# Altium PCB Keyboard.PcbDoc
Units mil, origin at the board's own origin, x right, y up, seen from the top; angles counter-clockwise.
Board outline 3000 x 3930 mil, 2 copper layers (Top Layer, Bottom Layer), stack 65.792 mil thick; 78 components, 48 nets, 290 pads, 195 vias.
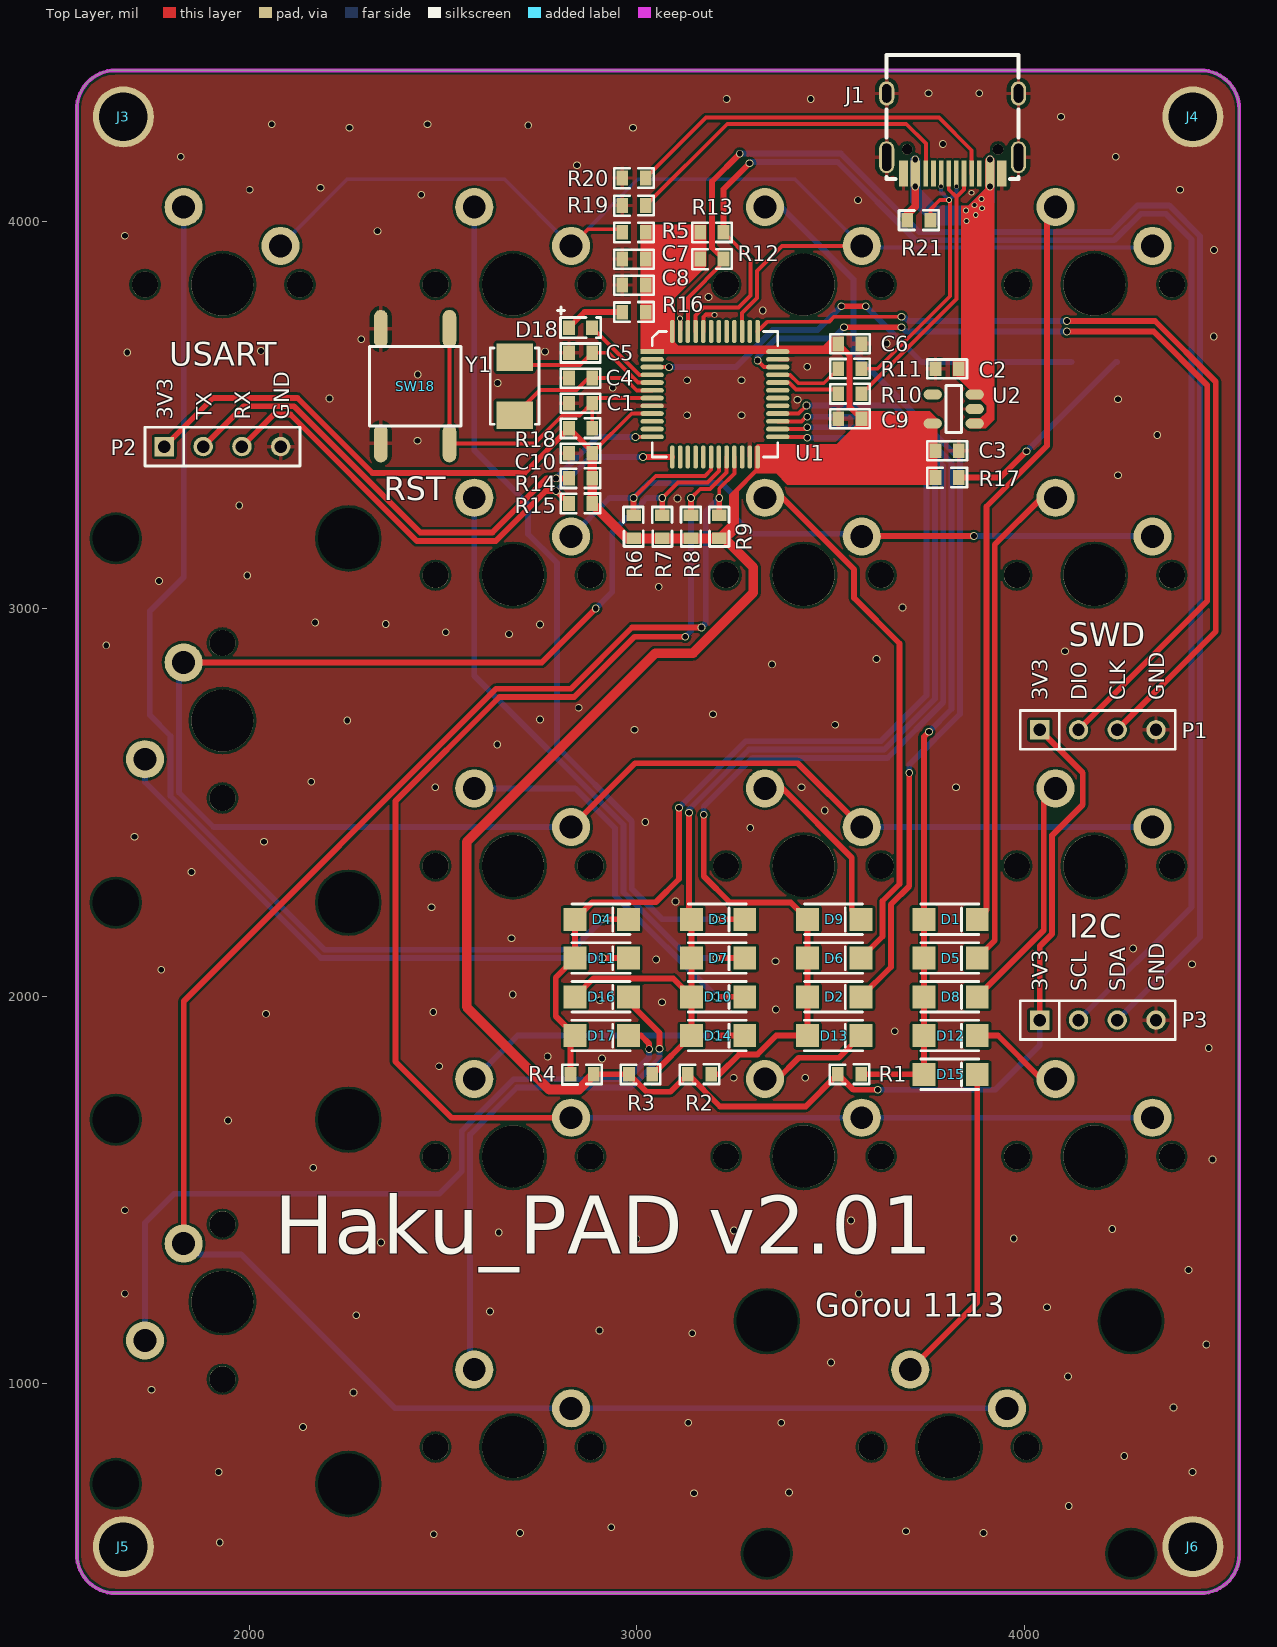
[diagram p0: Top Layer view]
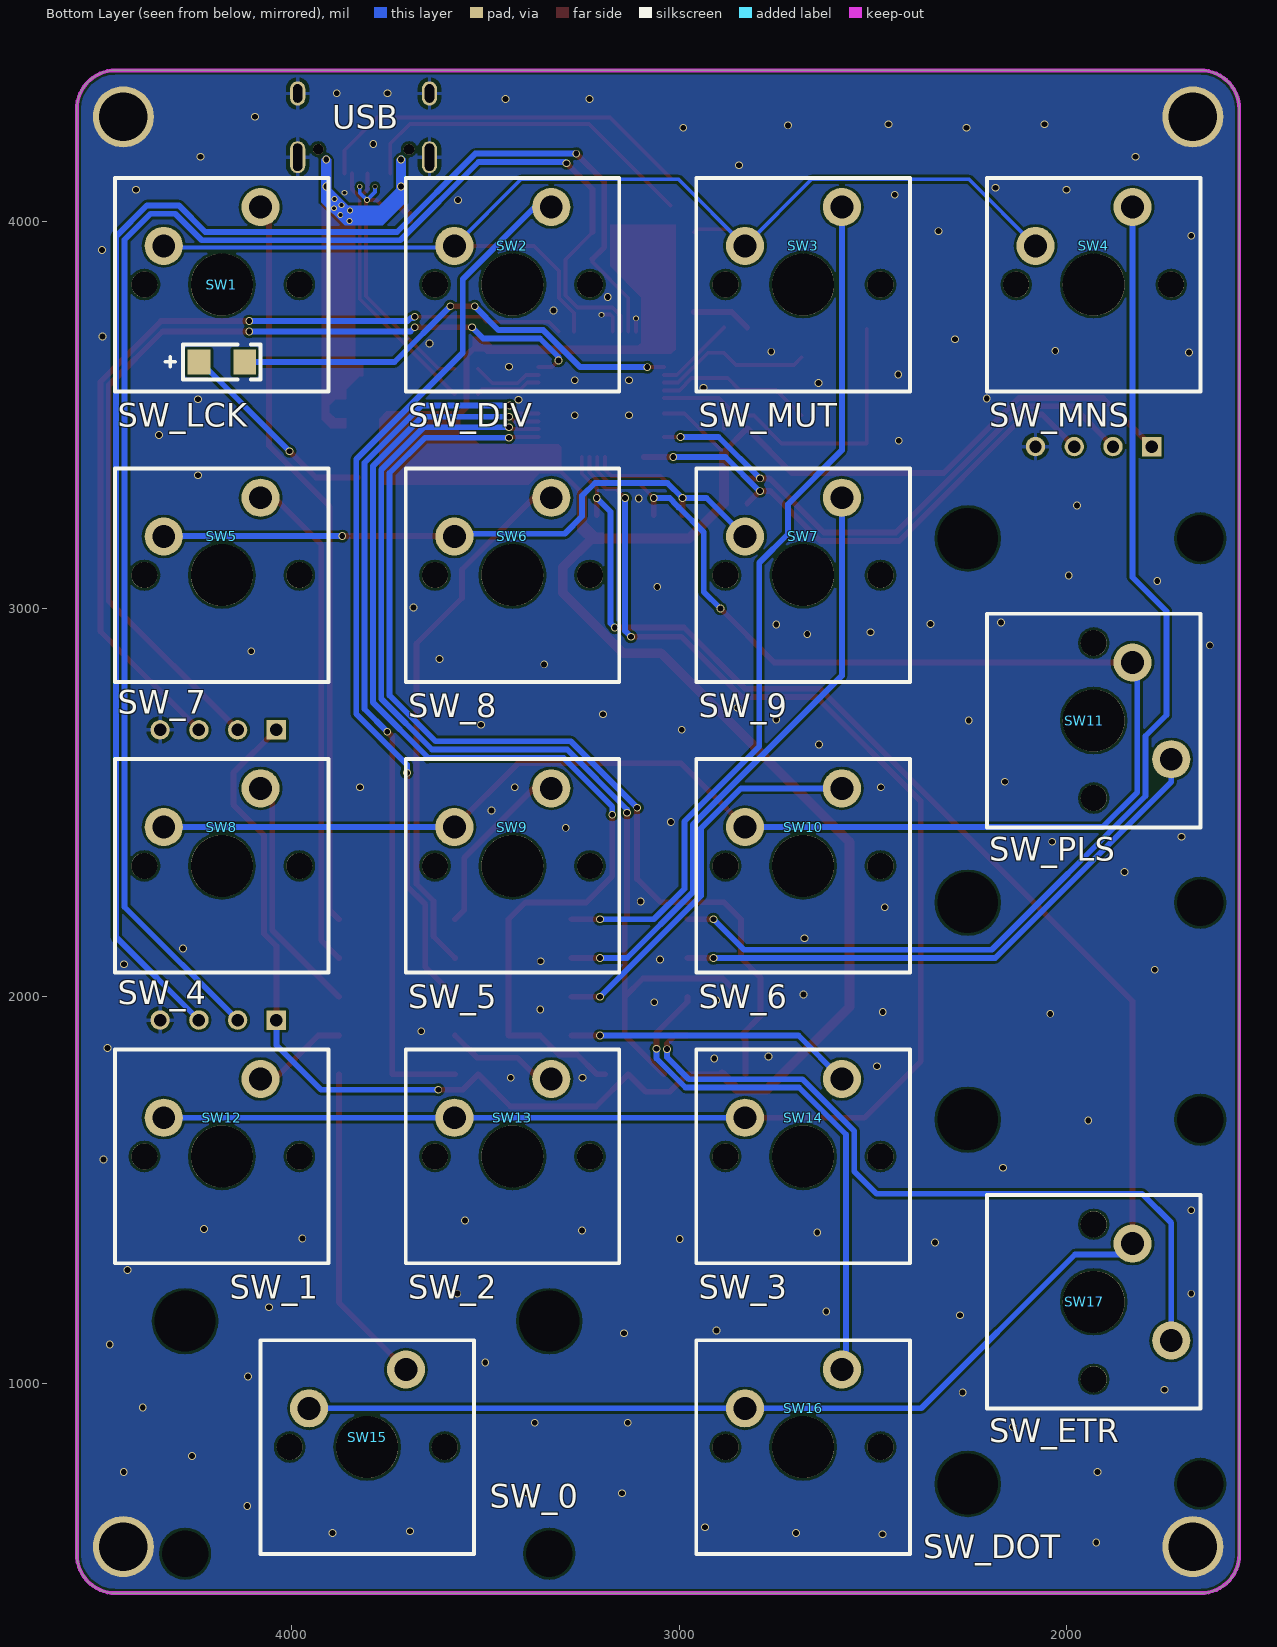
[diagram p1: Bottom Layer view, seen from below]
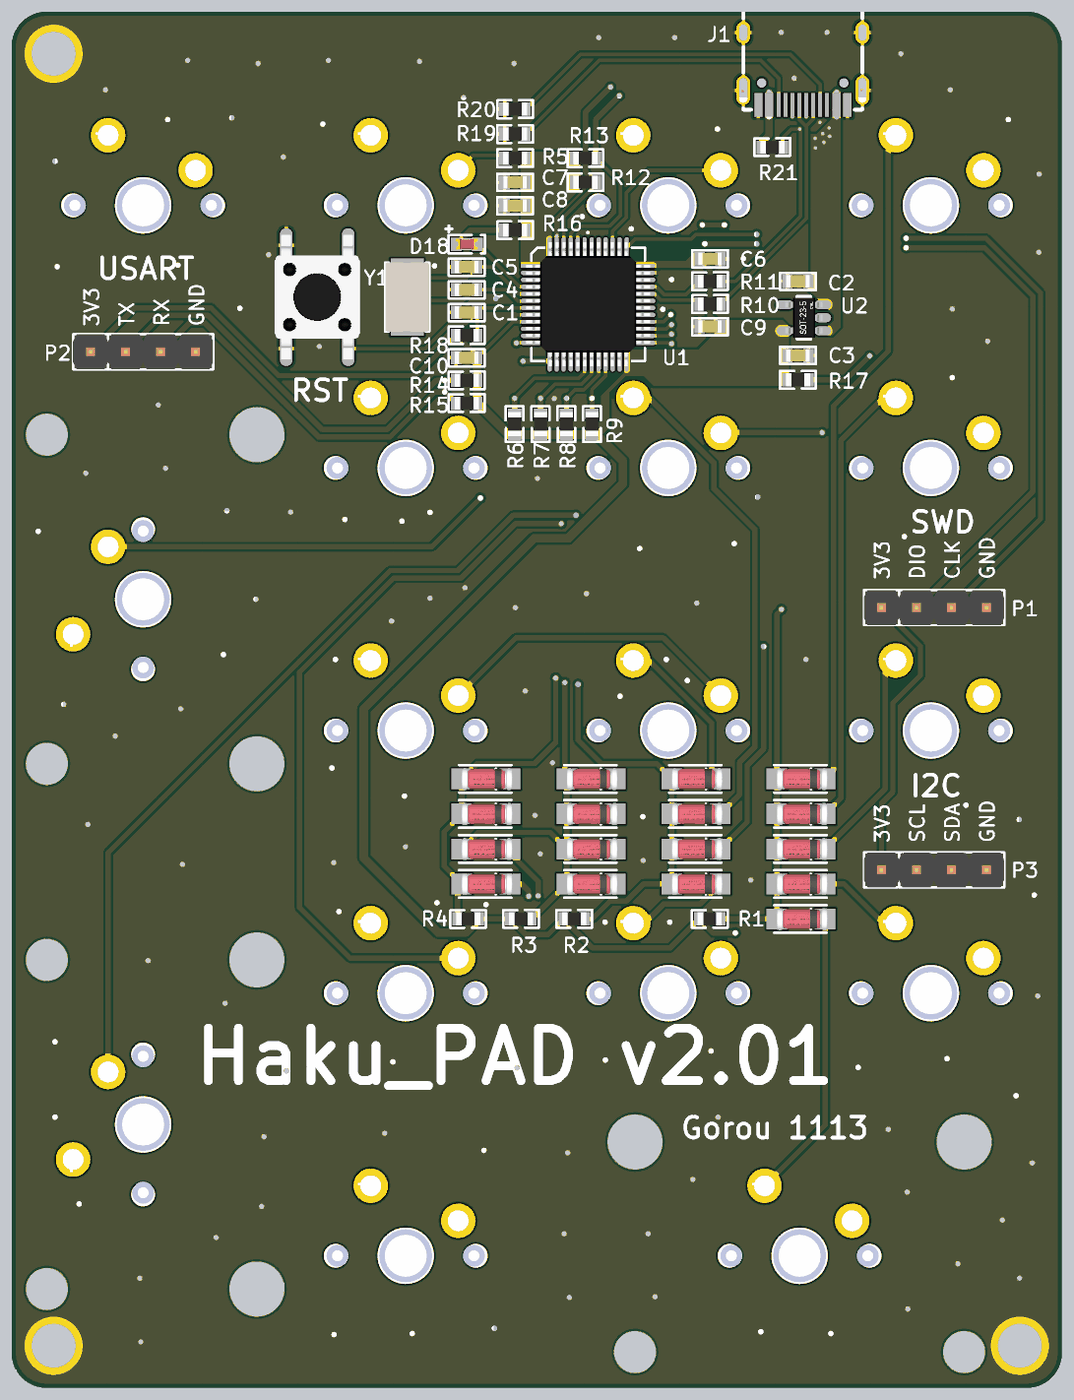
[diagram p2: 3D render of the assembled board from above, using the file's embedded part models]
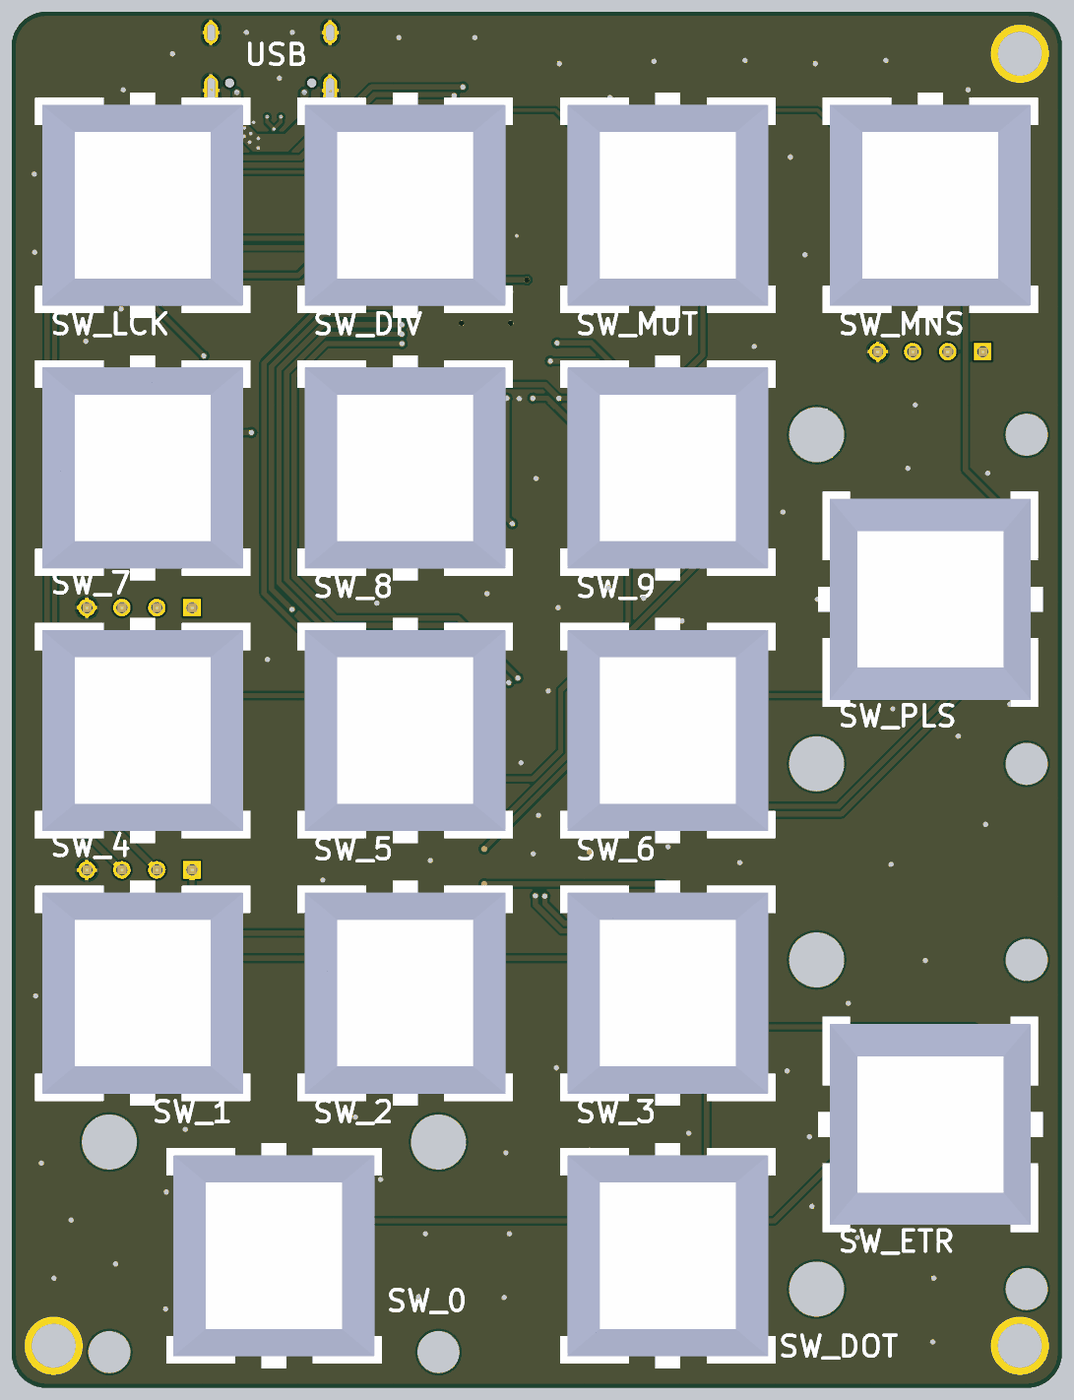
[diagram p3: 3D render of the assembled board from below, using the file's embedded part models]

## Layer stack, top to bottom
Top Solder: solder mask 0.4, Solder Resist, Dk 3.5
Top Layer: signal copper 1.4
Dielectric 1: dielectric 62.9921, FR-4, Dk 4.8
Bottom Layer: signal copper 1.4
Bottom Solder: solder mask 0.4, Solder Resist, Dk 3.5

## Board outline
1555,560 ccw(c1655,560) 1655,460 4455,460 ccw(c4455,560) 4555,560 4555,4290 ccw(c4455,4290) 4455,4390 1655,4390 ccw(c1655,4290) 1555,4290

## Design rules (kind name [scope] priority, off if disabled: settings)
Clearance [All] p1: gap=6.5 ignorepadtopadclearanceinfootprint=FALSE
DiffPairsRouting [All] p1: maxlimit=39370.08 minlimit=6.5 mostfreqgap=7.01 toplayer_minwidth=7 toplayer_maxwidth=39370.08 toplayer_prefwidth=7.01 bottomlayer_minwidth=7 bottomlayer_maxwidth=39370.08 bottomlayer_prefwidth=7.01 maxuncoupledlength=500
HoleSize [All] p1: absolutevalues=TRUE maxlimit=236.22 minlimit=0.98 maxpercent=80.000 minpercent=20.000
MinimumSolderMaskSliver [All] p1 off: minsoldermaskwidth=10
PolygonConnect PolygonConnect_isPad [(InPadClass('All Pads') AND ( Not HasFootprint('PADR3/4')))] p1: connectstyle=Relief reliefconductorwidth=10 reliefentries=4 polygonreliefangle="90 Angle" airgapwidth=10
PolygonConnect PolygonConnect_isHole [HasFootprint('PADR3/4') vs InNet('GND')] p2: connectstyle=Direct reliefconductorwidth=10 reliefentries=4 polygonreliefangle="90 Angle" airgapwidth=10
PolygonConnect [All] p3: connectstyle=Direct reliefconductorwidth=10 reliefentries=4 polygonreliefangle="90 Angle" airgapwidth=10
RoutingVias [All] p1: holewidth=28 width=50 viastyle="Through Hole" minholewidth=19.68 minwidth=27.56 maxholewidth=236.22 maxwidth=3937.01
SilkToSilkClearance [All] p1 off: silktosilkclearance=10
SilkToSolderMaskClearance [IsPad] p1 off: minsilkscreentomaskgap=10 clearancetoexposedcopper=TRUE
SolderMaskExpansion [All] p1: expansion=4
Width [All] p1: maxlimit=39370.08 minlimit=7 preferedwidth=7.01
25 further rules are at their usual default settings.

## Classes and differential pairs
component class Keyboard_KEYS: D1 D2 D3 D4 D5 D6 D7 D8 D9 D10 D11 D12 D13 D14 D15 D16 D17 J3 J4 J5 J6 R1 R2 R3 R4 R5 R6 R7 R8 R9 SW1 SW2 SW3 SW4 SW5 SW6 SW7 SW8 SW9 SW10 SW11 SW12 SW13 SW14 SW15 SW16 SW17
component class Keyboard_SYS: C1 C2 C3 C4 C5 C6 C7 C8 C9 C10 D18 J1 P1 P2 P3 R10 R11 R12 R13 R14 R15 R16 R17 R18 R19 R20 R21 SW18 U1 U2 Y1

## Components (designator, comment, footprint, x,y, rotation, side; value= is the part's Value field where it differs from the comment)
C1 "104" C0603 2825,3531 r0 top
C2 "105" C0603 3771,3620 r0 top value=104
C3 "105" C0603 3831,3408 r180 top value=104
C4 "15P" C0603 2825,3596 r0 top value=104
C5 "15P" C0603 2825,3661 r0 top value=104
C6 "105" C0603 3580,3684 r180 top value=104
C7 "105" C0603 2963,3903 r0 top value=104
C8 "105" C0603 2963,3836 r0 top value=104
C9 "105" C0603 3520,3491 r0 top value=104
C10 "105" C0603 2825,3402 r0 top value=104
D1 "1N4148" SOD80 3741,2199 r0 top locked
D2 "1N4148" SOD80 3441,1999 r0 top locked
D3 "1N4148" SOD80 3141,2199 r0 top locked
D4 "1N4148" SOD80 2841,2199 r0 top locked
D5 "1N4148" SOD80 3741,2099 r0 top locked
D6 "1N4148" SOD80 3441,2099 r0 top locked
D7 "1N4148" SOD80 3141,2099 r0 top locked
D8 "1N4148" SOD80 3741,1999 r0 top locked
D9 "1N4148" SOD80 3441,2199 r0 top locked
D10 "1N4148" SOD80 3141,1999 r0 top locked
D11 "1N4148" SOD80 2841,2099 r0 top locked
D12 "1N4148" SOD80 3741,1899 r0 top locked
D13 "1N4148" SOD80 3441,1899 r0 top locked
D14 "1N4148" SOD80 3141,1899 r0 top locked
D15 "1N4148" SOD80 3741,1799 r0 top locked
D16 "1N4148" SOD80 2841,1999 r0 top locked
D17 "1N4148" SOD80 2841,1899 r0 top locked
D18 "RED LED" LED0603-RED 2825,3726 r0 top
J1 "TYPEC-304S-ACP16" USB-C-SMD_TYPEC-304-BCP16 3815,4230 r180 top
J3 "Hole" PADR3/4#1 1645,4415 r0 top
J4 "Hole" PADR3/4#2 3704,4663 r0 top
J5 "Hole" PADR3/4#3 1640,525 r0 top
J6 "Hole" PADR3/4#4 4480,520 r0 top
P1 "SWD" SIP4 4040,2688 r0 top
P2 "USART" SIP4 1781,3419 r0 top
P3 "I2C" SIP4 4040,1939 r0 top
R1 "10K" R0603 3519,1799 r0 top locked value=1K
R2 "10K" R0603 3132,1799 r0 top locked value=1K
R3 "10K" R0603 2980,1799 r0 top locked value=1K
R4 "10K" R0603 2889,1799 r180 top locked value=1K
R5 "10K" R0603 3023,3972 r180 top value=1K
R6 "10K" R0603 2992,3182 r90 top value=1K
R7 "10K" R0603 3066,3182 r90 top value=1K
R8 "10K" R0603 3140,3182 r90 top value=1K
R9 "10K" R0603 3213,3182 r90 top value=1K
R10 "33" R0603 3520,3555 r0 top value=1K
R11 "33" R0603 3520,3620 r0 top value=1K
R12 "10K" R0603 3224,3903 r180 top value=1K
R13 "10K" R0603 3224,3972 r180 top value=1K
R14 "10K" R0603 2825,3337 r0 top value=1K
R15 "10K" R0603 2825,3272 r0 top value=1K
R16 "1K" R0603 2963,3766 r0 top
R17 "1K" R0603 3831,3339 r180 top
R18 "10K" R0603 2825,3466 r0 top value=1K
R19 "5K1" R0603 3023,4041 r180 top value=1K
R20 "5K1" R0603 3023,4112 r180 top value=1K
R21 "1K5" R0603 3698,4003 r0 top value=1K
SW1 "SW_LCK" MX_SW-4-1206LED 4180.71,3837.01 r0 bottom locked
SW2 "SW_DIV" MX_SW-4 3430.71,3837.01 r0 bottom locked
SW3 "SW_MUT" MX_SW-4 2680.71,3837.01 r0 bottom locked
SW4 "SW_MNS" MX_SW-4 1930.71,3837.01 r0 bottom locked
SW5 "SW_7" MX_SW-4 4180.71,3087.01 r0 bottom locked
SW6 "SW_8" MX_SW-4 3430.71,3087.01 r0 bottom locked
SW7 "SW_9" MX_SW-4 2680.71,3087.01 r0 bottom locked
SW8 "SW_4" MX_SW-4 4180.71,2337.01 r0 bottom locked
SW9 "SW_5" MX_SW-4 3430.71,2337.01 r0 bottom locked
SW10 "SW_6" MX_SW-4 2680.71,2337.01 r0 bottom locked
SW11 "SW_PLS" MX_SW-4_1x2_r 1930.71,2712.01 r90 bottom locked
SW12 "SW_1" MX_SW-4 4180.71,1587.01 r0 bottom locked
SW13 "SW_2" MX_SW-4 3430.71,1587.01 r0 bottom locked
SW14 "SW_3" MX_SW-4 2680.71,1587.01 r0 bottom locked
SW15 "SW_0" MX_SW-4_1x2 3805.71,837.01 r0 bottom locked
SW16 "SW_DOT" MX_SW-4 2680.71,837.01 r0 bottom locked
SW17 "SW_ETR" MX_SW-4_1x2_r 1930.71,1212.01 r90 bottom locked
SW18 "RST" "Push Buttom SMD" 2428,3575 r270 top
U1 "CH32V103C8T6" PQFP48 3040,3664 r0 top
U2 "RT9013-33" SOT-23-5 3818,3516 r180 top
Y1 "8MHz" CY5032 2685,3500 r90 top

## Footprints (in the part's own frame and the unit in brackets; to place one, negate y for a bottom-side part, rotate by r counter-clockwise, add the part's x,y. Pads: shape width x height; smd on the part's side, far side on the other; paste and mask are expansions set on the pad)
C0603 [mil]
  rect 30x38 smd: 1(0,0) 2(60,0)
  silkscreen extent -21,-25 81,24, body extent -3,-18 63,18, height 35
CY5032 [mm]
  rect 1.8x2.4 smd: 1(0,0) 2(3.8,0)
  silkscreen extent -0.6,-1.6 4.4,1.6, body extent -0.59,-1.6 4.41,1.6, height 1.23
LED0603-RED [mil]
  rect 31x38 smd: 1(0,0) 2(60,0)
  silkscreen extent -22,-26 82,26, body extent -1,-16 62,16, height 24
MX_SW-4 [mil] "with Fixation pins  1-Pole"
  round 98.43 hole 59.06: 1(150,-100) 2(-100,-200)
  round 67 hole 67: ""(-200,0) ""(200,0)
  round 160 hole 160: ""(0,0)
  silkscreen extent -276,-276 276,276, body extent -308,-321 308,321, height 586
MX_SW-4-1206LED [mm] "with Fixation pins  1-Pole"
  round 2.5 hole 1.5: 1(3.81,-2.54) 2(-2.54,-5.08)
  rect 1.49x1.62 smd: 3(1.492,5.08) 4(-1.492,5.08)
  round 1.702 hole 1.702: ""(-5.08,0) ""(5.08,0)
  round 4.064 hole 4.064: ""(0,0)
  silkscreen extent -7,-7 7,7, body extent -7.82,-8.17 7.82,8.17, height 14.89
MX_SW-4_1x2 [mil] "with Fixation pins  1-Pole"
  round 98.43 hole 59.06: 1(150,-100) 2(-100,-200)
  round 0 hole 120: 5(-470,275) 7(470,275)
  round 0 hole 157: 6(-470,-325) 8(470,-325)
  round 67 hole 67: ""(-200,0) ""(200,0)
  round 160 hole 160: ""(0,0)
  silkscreen extent -276,-276 276,276, body extent -308,-321 308,321, height 586
MX_SW-4_1x2_r [mil] "with Fixation pins  1-Pole"
  round 98.43 hole 59.06: 1(150,-100) 2(-100,-200)
  round 0 hole 120: 3(-470,-275) 6(470,-275)
  round 0 hole 157: 4(-470,325) 5(470,325)
  round 67 hole 67: ""(-200,0) ""(200,0)
  round 160 hole 160: ""(0,0)
  silkscreen extent -276,-276 276,276, body extent -308,-321 308,321, height 586
PADR3/4#1 [mm]
  round 4 hole 3.2: 1(0.762,-3.683)
PADR3/4#2 [mm]
  round 4 hole 3.2: 1(18.567,-9.982)
PADR3/4#3 [mm]
  round 4 hole 3.2: 1(0.889,1.397)
PADR3/4#4 [mm]
  round 4 hole 3.2: 1(-1.143,1.524)
PQFP48 [mil]
  rect 60x12 smd: 1(-0.17,0.2)
  oval 60x12 smd: 2(-0.17,-19.8) 3(-0.17,-39.8) 4(-0.17,-59.8) 5(-0.17,-79.8) 6(-0.17,-99.8) 7(-0.17,-119.8) 8(-0.17,-139.8) 9(-0.17,-159.8) 10(-0.17,-179.8) 11(-0.17,-199.8) 12(-0.17,-219.8) 25(323.83,-219.8) 26(323.83,-199.8) 27(323.83,-179.8) 28(323.83,-159.8) 29(323.83,-139.8) 30(323.83,-119.8) 31(323.83,-99.8) 32(323.83,-79.8) 33(323.83,-59.8) 34(323.83,-39.8) 35(323.83,-19.8) 36(323.83,0.2)
  oval 12x60 smd: 13(51.83,-271.8) 14(71.83,-271.8) 15(91.83,-271.8) 16(111.83,-271.8) 17(131.83,-271.8) 18(151.83,-271.8) 19(171.83,-271.8) 20(191.83,-271.8) 21(211.83,-271.8) 22(231.83,-271.8) 23(251.83,-271.8) 24(271.83,-271.8) 37(271.83,52.2) 38(251.83,52.2) 39(231.83,52.2) 40(211.83,52.2) 41(191.83,52.2) 42(171.83,52.2) 43(151.83,52.2) 44(131.83,52.2) 45(111.83,52.2) 46(91.83,52.2) 47(71.83,52.2) 48(51.83,52.2)
  silkscreen extent 0,-272 324,52, body extent -15,-286 339,68, height 57
"Push Buttom SMD" [mm]
  oval 2.5x0.9 smd: 1(-3.75,2.25) 2(3.75,2.25) 3(-3.75,-2.25) 4(3.75,-2.25)
  silkscreen extent -2.6,-3 2.6,3, body extent -4.5,-3 4.5,3, height 5
R0603 [mil]
  rect 30x38 smd: 1(0,0) 2(60,0)
  silkscreen extent -21,-25 81,26, body extent -4,-19 64,19, height 22
SIP4 [mil]
  rect 50x50 hole 32: 1(0,0)
  round 50 hole 32: 2(100,0) 3(200,0) 4(300,0)
  silkscreen extent -50,-50 350,50, body extent -50,-50 350,50, height 337
SOD80 [mm]
  rect 1.5x1.5 smd: 1(0,0) 2(3.5,0)
  silkscreen extent -0.2,-1 3.6,1, body extent -0.02,-0.81 3.68,0.79, height 1.6
SOT-23-5 [mm] "SOT23, 5-Leads, Body 2.90x2.79mm, Pitch 0.95mm, IPC Medium Density"
  oval 1.2x0.65 smd: 1(-1.375,0.95) 2(-1.375,0) 3(-1.375,-0.95) 4(1.375,-0.95) 5(1.375,0.95)
  silkscreen extent -0.5,-1.55 0.5,1.55, body extent -1.35,-1.45 1.35,1.45, height 1.09
USB-C-SMD_TYPEC-304-BCP16 [mm]
  oval 1x2.1 hole 0.6 slot 1.8 at 90 deg: 13(-4.32,1.633) 14(4.32,1.633)
  oval 1x1.6 hole 0.6 slot 1.2 at 90 deg: 15(-4.32,-2.547) 16(4.32,-2.547)
  rect 0.6x1.7 smd: A1B12(-3.225,2.7) A4B9(-2.45,2.7) B1A12(3.22,2.7) B4A9(2.45,2.7)
  rect 0.3x1.7 smd: A5(-1.25,2.7) A6(-0.25,2.7) A7(0.25,2.7) A8(1.25,2.7) B5(1.75,2.7) B6(0.75,2.7) B7(-0.75,2.7) B8(-1.75,2.7)
  round 0.7 hole 0.7 unplated: ""(-2.98,1.102) ""(2.98,1.102)
  silkscreen extent -4.32,-5.08 4.32,3.05

## Part data
C1 C2 C3 C4 C5 C6 C7 C8 C9 C10: library part "Cap Semi", "Capacitor (Semiconductor SIM Model)", LatestRevisionDate=29-May-2009, LatestRevisionNote="IPC-7351 Footprint Added.", PackageDescription="Chip Capacitor", PackageReference=C1206, Published=8-Jun-2000, Publisher="Altium Limited"
D1 D2 D3 D4 D5 D6 D7 D8 D9 D10 D11 D12 D13 D14 D15 D16 D17: library part Diode, "Default Diode"
D18: library part LED2, "Typical RED, GREEN, YELLOW, AMBER GaAs LED", LatestRevisionDate=17-Jul-2002, LatestRevisionNote="Re-released for DXP Platform.", PackageDescription="SM LED; 2 Flat Leads", PackageReference=3.2X1.6X1.1, PackageVersion=Feb-2002, Published=8-Jun-2000, Publisher="Altium Limited"
P1 P2 P3: library part "Header 4", "Header, 4-Pin", LatestRevisionDate=17-Jul-2002, LatestRevisionNote="Re-released for DXP Platform.", Publisher="Altium Limited"
R1 R2 R3 R4 R5 R6 R7 R8 R9 R10 R11 R12 R13 R14 R15 R16 R17 R18 R19 R20 R21: library part Res2, "Resistor", LatestRevisionDate=17-Jul-2002, LatestRevisionNote="Re-released for DXP Platform.", PackageDescription="Axial Device, Thru-Hole; 2 Leads; 0.4 in Pin Spacing", PackageReference=AXIAL-0.4, Published=8-Jun-2000, Publisher="Altium Limited"
SW1: library part MX_SW-4-1206LED
SW2 SW3 SW4 SW5 SW6 SW7 SW8 SW9 SW10 SW11 SW12 SW13 SW14 SW15 SW16 SW17: library part "Push Buttom_2"
SW18: library part "Push Buttom"
U1: library part STM32F103C8Tx, "STM32F103C8Tx series arm mcu"
U2: "RT9013 3.3V  LDO Regulator"
Y1: library part XTAL, "Crystal Oscillator", LatestRevisionDate=17-Jul-2002, LatestRevisionNote="Re-released for DXP Platform.", PackageDescription="Crystal, Thru-Hole; 2 Leads; Body 3.1 x 8.2 mm (Dia.xH)", PackageReference=R38, Published=8-Jun-2000, Publisher="Altium Limited"

## Via types
v1: diameter 20, hole 15, Top Layer to Bottom Layer, tented both sides, 183 vias
v2: diameter 15, hole 10, Top Layer to Bottom Layer, tented both sides, 10 vias
v3: diameter 13, hole 10, Top Layer to Bottom Layer, tented both sides, 2 vias

## Nets (pads, with @x,y where several pads share a name; then routed paths per layer and width w, separated by ;. In a path a pad name is that pad's centre, name@x,y a point inside that pad or via, vN(x,y) a via of type N, cw(c..) or ccw(c..) an arc to the next point about the centre after c; other vN are vias at no path point)
3V3: C3.2 C6.2 C7.2 C8.2 C9.2 C10.2 P1.1 P2.1 P3.1 R1.1 R2.1 R3.1 R4.1 R5.1 R6.1 R7.1 R8.1 R9.1 R12.2 R13.2 R14.2 R15.2 R16.2 R17.2 R18.1 U1.1 U1.9 U1.24 U1.36 U1.48 U2.5 | length 6750.5
  Top Layer w10: C10.2 2987.2,3504.2 U1.9 ; R9.1 3258,3227 3258,3306 3311.83,3359.83 U1.24
  Top Layer w15: P2.1 1906.5,3544.5 2124.31,3544.5 2317.81,3351 2710,3351 R18.1 2885,3406 C10.2 ; R4.1 R3.1 3025,1754 3087,1754 R2.1 3215,1716 3436,1716 R1.1 3559,1759 v1(3622,1759) ; C6.2 3549,3655 3549,3522 C9.2 ; P3.1 4040,2129.8 4072,2161.8 4072,2416 4151,2495 4151,2577 P1.1
  Top Layer w25: C10.2 R14.2 R15.2 2975,3182 R6.1 R7.1 R8.1 R9.1 3226,3182 3301,3107 3301,3042 3145,2886 3048,2886 2561,2399 2561,1973 2774,1760 2850.87,1760 2889,1798.13 R4.1
  Bottom Layer w15: v1(3622,1759) 3925,1759 4040,1874 P3.1
+5V: C2.2 J1.A4B9 J1.B4A9 R21.1 U2.1 U2.3 | length 95.5
  Top Layer w20: R21.1 3698,4018 3718.55,4038.55 v1(3718.55,4090)
  other v1: 3911.46,4090 3718.55,4160 3911.46,4160
  other v2: 3851,4001 3875,4017 3850,4028 3891,4034 3872,4042 3890,4058
DEBUG_LED: D18.2 U1.4 | length 205.3
  Top Layer w10: D18.2 3006.8,3604.2 U1.4
GND: C1.1 C2.1 C3.1 C4.1 C5.1 C6.1 C7.1 C8.1 C9.1 C10.1 J1.13 J1.14 J1.15 J1.16 J1.A1B12 J1.B1A12 J3.1 J4.1 J5.1 J6.1 P1.4 P2.4 P3.4 R19.2 R20.2 SW18.3 SW18.4 U1.8 U1.23 U1.35 U1.44 U1.47 U2.2 | length 103.3
  Top Layer w10: U1.47 3112,3716.38 v2(3112,3750) ; U1.44 3171.83,3753.17 3178.65,3760 3200,3760 v2(3201,3759)
  other v1: 1924,591 2476,612 2699,615 3895,615 3695,620 2934,630 4115,685 3148,718 3393,720 1921,773 4434,773 4258,814 2139,889 3133,900 3373,900 4385,939 2269,978 1748,985 4113,1019 3501,1055 4470,1102 3143,1131 2904,1138 2276,1177 2621,1187 4059,1198 1679,1233 3573,1233 4424,1294 2340,1365 2999,1374 3973,1375 2644,1391 3251,1396 4227,1400 3553,1422 1679,1448 2165,1558 4486,1579 1945,1680 3250,1790 3435,1790 2490,1820 2910,1840 2770,1845 4476,1867 3666,1910 2043,1955 2475,1960 3359,1966 3065,1985 2905,1990 2680,2005 1773,2069 4433,2083 3358,2091 3050,2095 4281,2124 2677,2150 2470,2230 3100,2245 1851,2321 2038,2399 1704,2412 3293,2435 3022,2450 3485,2480 2480,2540 3425,2540 3824,2540 2160,2554 2640,2650 2994,2688 3512,2701 2253,2712 2750,2715 3197,2728 2850,2745 3349,2857 3619,2871 4105,2891 1631,2906 2670,2935 2507,2940 2750,2960 2352,2961 2170,2965 3686,3004 3057,3057 1767,3072 1995,3086 1974,3267 3105,3285 4242,3345 2434,3434 4343,3449 3130,3500 3270,3500 3415,3540 4242,3541 2207,3543 2938,3571 2641,3583 3130,3590 3270,3590 2435,3605 3440,3625 1685,3662 2763,3664 2030,3666 3645,3685 2289,3696 4489,3703 3325,3770 3185,3805 4490,3926 1679,3963 2331,3975 3571,4055 2444,4069 2001,4082 4402,4082 2184,4087 2846,4145 1823,4167 4236,4167 3790,4200 2259,4242 2990,4242 2720,4248 2058,4251 2460,4251 4095,4270 3232,4316 3449,4316 3753,4331 3884,4331
  other v2: 3864,4074
I2C_SCL: P3.2 R13.1 U1.45 | length 4019.2
  Top Layer w10: U1.45 3151.83,3756.83 3173,3778 3262.67,3778 3294,3809.33 3294,3902 R13.1
  Top Layer w15: R13.1 3224,4083 v1(3291,4150)
  Bottom Layer w15: v1(3291,4150) 3294.5,4153.5 3518.09,4153.5 3720.09,3951.5 4232.5,3951.5 4301,4020 4365,4020 4432,3953 4432,2231 P3.2
I2C_SDA: P3.3 R12.1 U1.46 | length 3983.1
  Top Layer w10: U1.46 3131.83,3802.83 3224,3895 R12.1
  Top Layer w15: R12.1 3194,3933 3194,4103 v1(3266,4175)
  Bottom Layer w15: v1(3266,4175) 3527,4175 3729,3973 4223.59,3973 4292.09,4041.5 4373.91,4041.5 4453.5,3961.91 4453.5,2152.5 P3.3
KEY_COL0: D1.1 D5.1 D8.1 D12.1 D15.1 R1.2 U1.28 | length 2288.7
  Top Layer w10: U1.28 3417.8,3504.2 3438,3524.41 v1(3438,3525)
  Top Layer w15: R1.2 D15.1 D12.1 D8.1 D5.1 D1.1 3741,2670 v1(3754,2683)
  Bottom Layer w15: v1(3438,3525) 3664.81,3525 3812.5,3377.31 3812.5,2741.5 v1(3754,2683)
KEY_COL1: D2.1 D6.1 D9.1 D13.1 R2.2 U1.27 | length 2908.1
  Top Layer w10: U1.27 3424.8,3484.2 3436.59,3496 v1(3440,3496)
  Top Layer w15: v1(3173,2469) 3173,2310 3240.47,2242.53 3397.47,2242.53 D9.1 D6.1 D2.1 D13.1 3360,1899 3311.22,1850.22 3264.22,1850.22 3213,1799 R2.2
  Bottom Layer w15: v1(3173,2469) 3173,2490.19 3298.31,2615.5 3647.31,2615.5 3791,2759.19 3791,3368.41 3663.41,3496 v1(3440,3496)
KEY_COL2: D3.1 D7.1 D10.1 D14.1 D16.1 R3.2 U1.26 | length 2864.6
  Top Layer w10: U1.26 3435.2,3464.2 v1(3440,3469)
  Top Layer w15: D16.1 2888,2046 3094,2046 D10.1 ; R3.2 3041,1799 D14.1 D10.1 ; v1(3135,2474) 3135,2205 D3.1 D7.1 D10.1
  Bottom Layer w15: v1(3135,2474) 3135,2482.59 3289.41,2637 3638.41,2637 3769.5,2768.09 3769.5,3359.5 3660,3469 v1(3440,3469)
KEY_COL3: D4.1 D11.1 D17.1 R4.2 U1.25 | length 2697.1
  Top Layer w10: U1.25 3437.8,3444.2 v1(3440,3442)
  Top Layer w15: R4.2 2829,1887 D17.1 2791,1949 2791,2049 D11.1 D4.1 2885,2243 3049,2243 3109,2303 v1(3109,2487)
  Bottom Layer w15: v1(3109,2487) 3280.5,2658.5 3629.5,2658.5 3748,2777 3748,3350.59 3656.59,3442 v1(3440,3442)
KEY_ROW0: R5.2 SW1.1 SW2.1 SW3.1 SW4.1 U1.39 | length 3161.4
  Top Layer w10: SW3.1 2873.7,3980 2955,3980 R5.2 ; U1.39 3271.83,3763.83 3310.5,3802.5 3310.5,3872.5 3375.01,3937.01 SW2.1
  Bottom Layer w10: SW4.1 2252.7,4109 2658.72,4109 SW3.1 3002.7,4109 3408.72,4109 SW2.1 3585.22,3932.5 4326.2,3932.5 SW1.1
KEY_ROW1: R6.2 SW5.1 SW6.1 SW7.1 U1.18 | length 1953.4
  Top Layer w10: v1(2992,3286) 3049,3343 3175.67,3343 3191.83,3359.16 U1.18
  Top Layer w15: R6.2 v1(2992,3286) ; SW6.1 3581.7,3188 v1(3870,3188)
  Bottom Layer w15: SW7.1 2929.7,3286 v1(2992,3286) 3031,3325 3218,3325 3251,3292 3251,3239 3296,3194 3573.72,3194 SW6.1 ; v1(3870,3188) 4329.72,3188 SW5.1
KEY_ROW2: R7.2 SW8.1 SW9.1 SW10.1 SW11.1 U1.19 | length 4783.4
  Top Layer w10: v1(3066,3286) 3106,3326 3156.67,3326 3157.17,3326.5 3182.5,3326.5 3211.83,3355.83 U1.19
  Top Layer w15: SW11.1 2755.01,2862.01 v1(2894,3001) ; SW10.1 2995.7,2602 3415.72,2602 SW9.1 ; R7.2 v1(3066,3286)
  Bottom Layer w15: SW11.1 1818.5,2849.8 1818.5,2526.31 1907.8,2437.01 SW10.1 ; v1(2894,3001) 2937,3044 2937,3198 3001,3262 3001.94,3262 3016,3276.06 3016,3277 3025,3286 v1(3066,3286) ; SW9.1 SW8.1
KEY_ROW3: R8.2 SW12.1 SW13.1 SW14.1 U1.20 | length 4176.4
  Top Layer w10: v1(3140,3286) 3164,3310 3189.33,3310 3231.83,3352.49 U1.20
  Top Layer w15: SW14.1 2521.99,1687.01 2377,1832 2377,2503.59 2645.91,2772.5 2838.91,2772.5 2994.41,2928 v1(3125,2928) ; R8.2 v1(3140,3286)
  Bottom Layer w15: SW14.1 SW13.1 SW12.1 ; v1(3125,2928) 3140,2943 v1(3140,3286)
KEY_ROW4: R9.2 SW15.1 SW16.1 SW17.1 U1.21 | length 5181.8
  Top Layer w10: v1(3213,3286) 3213,3310.33 3251.83,3349.16 U1.21
  Top Layer w15: SW17.1 1830.71,1987.71 2637,2794 2830,2794 2988,2952 v1(3167,2952) ; R9.2 v1(3213,3286)
  Bottom Layer w15: SW17.1 1858.72,1334 1979,1334 2375.99,937.01 SW16.1 SW15.1 ; v1(3167,2952) 3178,2963 3178,3251 v1(3213,3286)
NetD1_2: D1.2 SW1.2 | length 1921.6
  Top Layer w15: D1.2 3902.5,2222.7 3902.5,3264.5 4059,3421 4059,4015.3 SW1.2
NetD2_2: D2.2 SW2.2 | length 2377
  Top Layer w15: D2.2 3656,2076.2 3656,2237.59 3703,2284.59 v1(3703,2577)
  Bottom Layer w15: SW2.2 3372.99,4037.01 3559,3851 3559,3661.22 3834,3386.22 3834,2729 3703,2598 v1(3703,2577)
NetD3_2: D3.2 SW3.2 | length 2251.9
  Top Layer w15: v1(3205,2199) D3.2
  Bottom Layer w15: SW3.2 2580.71,3409.29 2719.64,3270.36 2719.64,3193.36 2794,3119 2794,2644.81 2987,2451.81 2987,2277.81 3065.81,2199 v1(3205,2199)
NetD4_2: D4.2 SW4.2 | length 2957
  Top Layer w15: v1(2912,2199) D4.2
  Bottom Layer w15: SW4.2 1830.71,3081.71 1743,2994 1743,2726 1797,2672 1797,2517.41 2193.91,2120.5 2833.5,2120.5 v1(2912,2199)
NetD5_2: D5.2 SW5.2 | length 1292.6
  Top Layer w15: D5.2 3924,2144.2 3924,3166 4045.01,3287.01 SW5.2
NetD6_2: D6.2 SW6.2 | length 1399.7
  Top Layer w15: SW6.2 3375.99,3287.01 3561,3102 3561,3028 3678.21,2910.79 3678.21,2290.21 3634.5,2246.5 3634.5,2154.7 D6.2
NetD7_2: D7.2 SW7.2 | length 1561.2
  Top Layer w15: v1(3205,2099) D7.2
  Bottom Layer w15: SW7.2 2580.71,2827.7 2965.5,2442.91 2965.5,2268.91 3135.41,2099 v1(3205,2099)
NetD8_2: D8.2 SW8.2 | length 621.6
  Top Layer w15: D8.2 4050.5,2170.7 4050.5,2506.8 SW8.2
NetD9_2: D9.2 SW9.2 | length 467.3
  Top Layer w15: SW9.2 3375.99,2537.01 3555,2358 3555,2222.8 D9.2
NetD10_2: D10.2 SW10.2 | length 1022.9
  Top Layer w15: v1(3205,1999) D10.2
  Bottom Layer w15: SW10.2 2840.99,2537.01 2944,2434 2944,2260 v1(3205,1999)
NetD11_2: D11.2 SW11.2 | length 1495
  Top Layer w15: v1(2912,2099) D11.2
  Bottom Layer w15: SW11.2 1730.71,2553.29 2185,2099 v1(2912,2099)
NetD12_2: D12.2 SW12.2 | length 248.3
  Top Layer w15: D12.2 3932,1899 4043.99,1787.01 SW12.2
NetD13_2: D13.2 SW13.2 | length 294.5
  Top Layer w15: SW13.2 3363.01,1787.01 3418,1842 3521.8,1842 D13.2
NetD14_2: D14.2 SW14.2 | length 744.5
  Top Layer w15: v1(3205,1899) D14.2
  Bottom Layer w15: SW14.2 2692.7,1899 v1(3205,1899)
NetD15_2: D15.2 SW15.2 | length 833.7
  Top Layer w15: SW15.2 3878.8,1210.09 D15.2
NetD16_2: D16.2 SW16.2 | length 1374.1
  Top Layer w15: D16.2 2978.8,1986.2 3059,1906 v1(3059,1865)
  Bottom Layer w15: SW16.2 2570,1047.72 2570,1644 2691,1765 2984.41,1765 3059,1839.59 v1(3059,1865)
NetD17_2: D17.2 SW17.2 | length 1940
  Top Layer w15: D17.2 3011,1899 3032,1878 v1(3032,1864)
  Bottom Layer w15: SW17.2 1730.71,1415.71 1806,1491 2491,1491 2548.5,1548.5 2548.5,1652.91 2682.09,1786.5 2975.5,1786.5 3032,1843 v1(3032,1864)
NetD18_1: D18.1 R16.1 | length 154.6
  Top Layer w15: D18.1 2865,3766 R16.1
NetJ1_A5: J1.A5 R20.1 | length 1000.8
  Top Layer w10: R20.1 3179,4268 3780,4268 3864.21,4183.79 J1.A5
NetJ1_B5: J1.B5 R19.1 | length 908.5
  Top Layer w10: R19.1 3233.5,4251.5 3695.5,4251.5 3746.1,4200.9 J1.B5
NetR10_1: R10.1 U1.32 | length 168.3
  Top Layer w10: U1.32 3392.58,3584.2 3410.78,3566 3509,3566 R10.1
NetR11_1: R11.1 U1.33 | length 180.7
  Top Layer w10: U1.33 3395.91,3604.2 3417.61,3582.5 3482.5,3582.5 R11.1
NetR17_1: R17.1 SW1.3 | length 531.9
  Top Layer w15: R17.1 3938,3339 v1(4006,3407)
  Bottom Layer w15: v1(4006,3407) 4236.01,3637.01 SW1.3
NRST: C1.2 R18.2 SW18.1 SW18.2 U1.7 | length 931.9
  Top Layer w10: SW18.1 SW18.2 2736.1,3427.36 2807.74,3499 2853,3499 C1.2 ; R18.2 C1.2 ; U1.7 2898.2,3544.2 C1.2
NUM_LED: SW1.4 U1.3 | length 1206.9
  Top Layer w10: U1.3 3082.8,3624.2 v1(3083,3624)
  Top Layer w15: v1(3528,3781) v1(3591,3781)
  Bottom Layer w15: v1(3083,3624) 3255.59,3624 3351.09,3719.5 3466.5,3719.5 v1(3528,3781) ; v1(3591,3781) 3734.99,3637.01 SW1.4
OSC_IN: C5.2 U1.5 Y1.2 | length 407.6
  Top Layer w10: Y1.2 2704.61,3630 2854,3630 C5.2 2926.67,3661 3003.46,3584.2 U1.5
OSC_OUT: C4.2 U1.6 Y1.1 | length 407.8
  Top Layer w10: Y1.1 2750.5,3565.5 2844.76,3565.5 2875.26,3596 C4.2 2968.33,3596 3000.13,3564.2 U1.6
SWDCLK: P1.3 U1.37 | length 2270.9
  Top Layer w10: U1.37 3336.62,3741 3496,3741 3509,3754 v1(3683,3754)
  Top Layer w15: v1(4110,3743) 4337.41,3743 4494,3586.41 4494,2942 P1.3
  Bottom Layer w15: v1(3683,3754) 3686,3751 3692.94,3751 3700.94,3743 v1(4110,3743)
SWDIO: P1.2 U1.34 | length 2349.3
  Top Layer w10: v1(3312,3641) 3328.8,3624.2 U1.34
  Top Layer w15: v1(3535,3727) v1(3683,3727) ; v1(4110,3716) 4334,3716 4472.5,3577.5 4472.5,3020.5 P1.2
  Bottom Layer w15: v1(3312,3641) 3312,3650 3360,3698 3506,3698 v1(3535,3727) ; v1(3683,3727) 3694,3716 v1(4110,3716)
USART_RX: P2.3 R15.1 U1.13 | length 1416
  Top Layer w15: P2.3 2063.5,3501.5 2106.5,3501.5 2432.5,3175.5 2636.26,3175.5 2764.76,3304 v1(2792,3304) 2793,3304 R15.1 ; v1(3016,3392) 3016.2,3392.2 U1.13
  Bottom Layer w15: v1(2792,3304) 2792.94,3304 2880.94,3392 v1(3016,3392)
USART_TX: P2.2 R14.1 U1.12 | length 1472.3
  Top Layer w10: v1(2997,3444) 2997.2,3444.2 U1.12
  Top Layer w15: P2.2 1985,3523 2115.41,3523 2441.41,3197 2627.36,3197 2767.36,3337 v1(2792,3337) R14.1
  Bottom Layer w15: v1(2792,3337) 2899,3444 v1(2997,3444)
USB_DM: J1.A7 J1.B7 R10.2 | length 747.3
  Top Layer w10: R10.2 3825,3800 3825,4062.87 ; J1.A7 3805.16,4082.71 3825,4062.87 ; J1.B7 3844.53,4082.4 3825,4062.87
USB_DP: J1.A6 J1.B6 R11.2 R21.2 | length 727.3
  Top Layer w10: R11.2 3621.67,3620 3808.5,3806.83 3808.5,4052.5 v2(3806,4055) 3782,4055 3758,4031 R21.2
  Bottom Layer w10: v3(3785.47,4090) 3785.47,4075.53 v2(3806,4055) 3824.84,4073.84 v3(3824.84,4090)
pads on no net: J1. J1.A8 J1.B8 SW1. SW2. SW3. SW4. SW5. SW6. SW7. SW8. SW9. SW10. SW11. SW11.3 SW11.4 SW11.5 SW11.6 SW12. SW13. SW14. SW15. SW15.5 SW15.6 SW15.7 SW15.8 SW16. SW17. SW17.3 SW17.4 SW17.5 SW17.6 U1.2 U1.10 U1.11 U1.14 U1.15 U1.16 U1.17 U1.22 U1.29 U1.30 U1.31 U1.38 U1.40 U1.41 U1.42 U1.43 U2.4

## Polygon pours and split planes (outlines as drawn)
GND on Bottom Layer "Bottom Layer-GND" (solid, remove dead copper, pour order 0): 1555,4390 4555,4390 4555,460 1555,460
GND on Top Layer "Top Layer-GND" (solid, remove dead copper, pour order 2): 1555,4390 4555,4390 4555,460 1555,460

## Keep-outs
Keep-Out Layer:
  the board outline again, w10

## Other copper
Top Layer:
  region net 3V3: 3095,3691 3107,3679 3481,3679 3505,3703 3533,3703 3533,3665 3505,3665 3498,3658 3062,3658
  region net 3V3: 3010,3991 3010,3669 3021,3658 3070,3658 3098,3686 3098,3803 3179,3884 3179,3991
  region net +5V: 3837,4041 3855,4041 3899,4085 3899,4161 3908,4170 3915,4170 3923,4162 3923,3488 3901,3466 3860,3466 3860,3492 3887,3492 3903,3508 3903,3525 3887,3541 3860,3541 3860,3566 3825,3601 3816,3601 3816,3639 3837,3639
  region net 3V3: 3775,3491 3775,3321 3389,3321 3360,3350 3309,3350 3263,3304 3263,3201 3230,3168 3195,3168 3195,3197 3212,3197 3239,3224 3239,3295 3305,3361 3305,3419 3311,3425 3516,3425 3565,3474 3565,3510 3756,3510
Bottom Layer:
  region net +5V: 3706,4050 3766,3990 3864,3990 3924,4050 3924,4161 3915,4170 3908,4170 3899,4161 3899,4085 3855,4041 3775,4041 3731,4085 3731,4161 3722,4170 3714,4170 3706,4162

## Silkscreen, mask and mechanical layers (free items; w line width, h text height)
Top Overlay:
  lines w8: 2795,3770 2813,3770 ; 2804,3761 2804,3779
  text "USART" at 1793,3628 h60
  text "3V3" at 1803,3488 h40 r90
  text "TX" at 1903,3488 h40 r90
  text "RX" at 2003,3488 h40 r90
  text "GND" at 2103,3488 h40 r90
  text "SWD" at 4115,2904 h60
  text "3V3" at 4061,2765 h40 r90
  text "DIO" at 4161,2765 h40 r90
  text "CLK" at 4261,2765 h40 r90
  text "GND" at 4361,2765 h40 r90
  text "I2C" at 4116,2151 h60
  text "3V3" at 4061,2013 h40 r90
  text "SCL" at 4161,2013 h40 r90
  text "SDA" at 4261,2013 h40 r90
  text "GND" at 4361,2013 h40 r90
  text "Haku_PAD v2.01" at 2065,1336 h150
  text "Gorou 1113" at 3461,1174 h60
Bottom Overlay:
  lines w10: 4302,3638 4326,3638 ; 4314,3626 4314,3650
  text "USB" at 3896,4239 h60